# EAGLE board arduino-breakout (EAGLE 5.00)
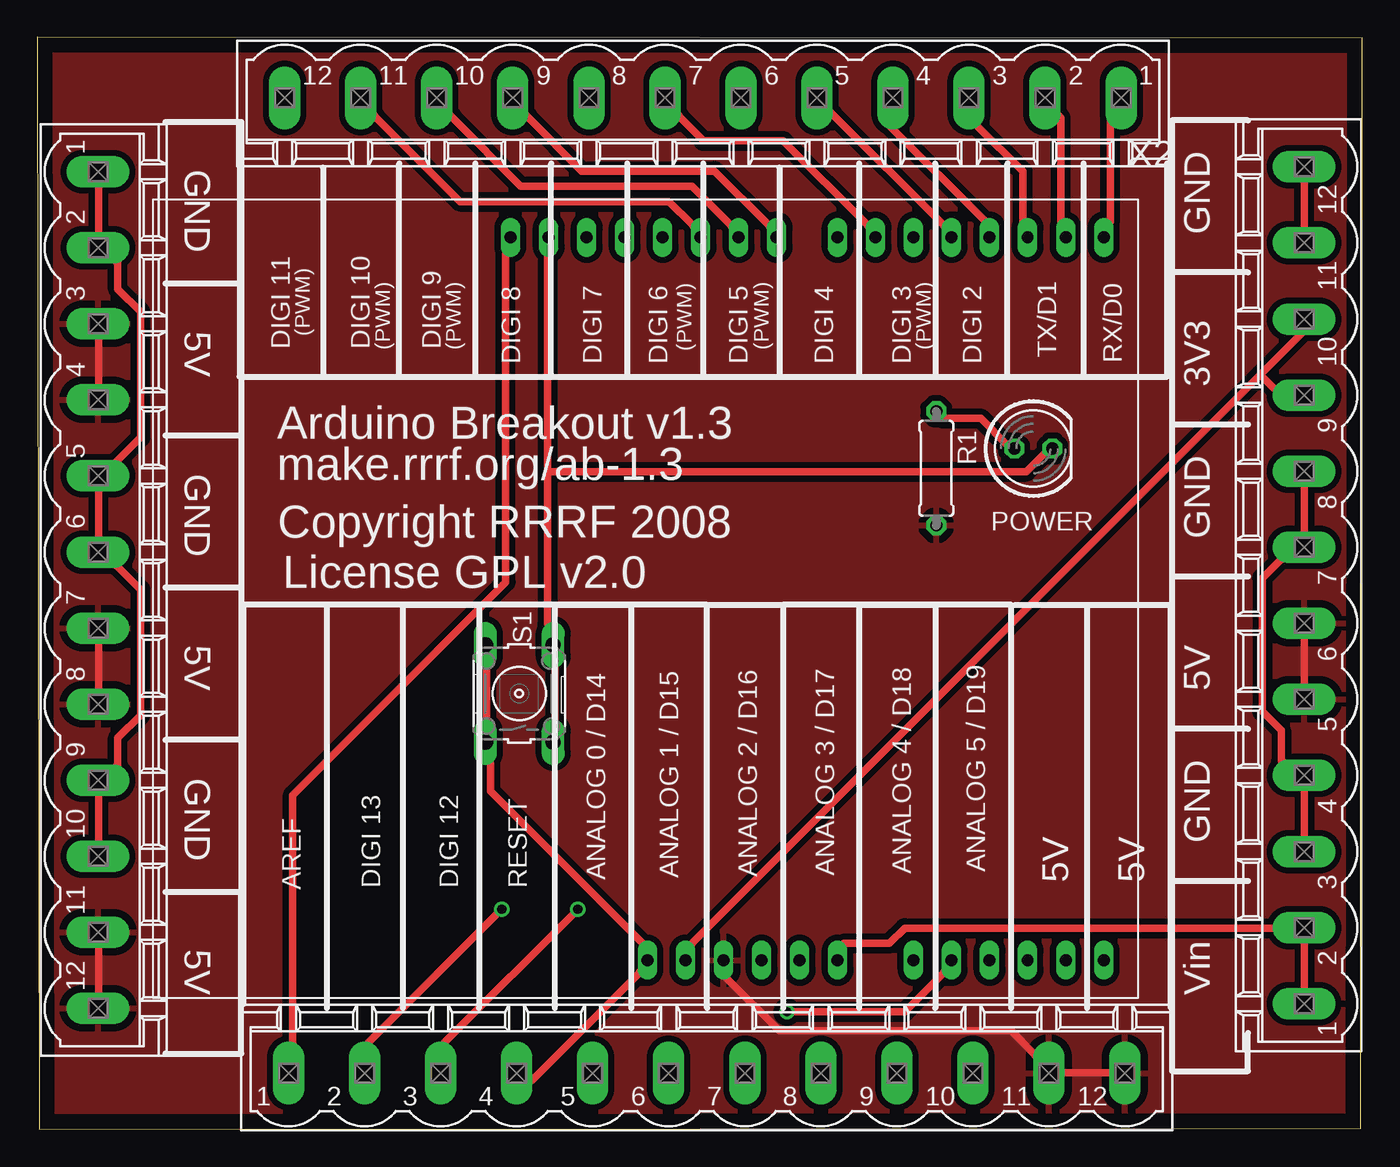
[diagram p0: board, top side]
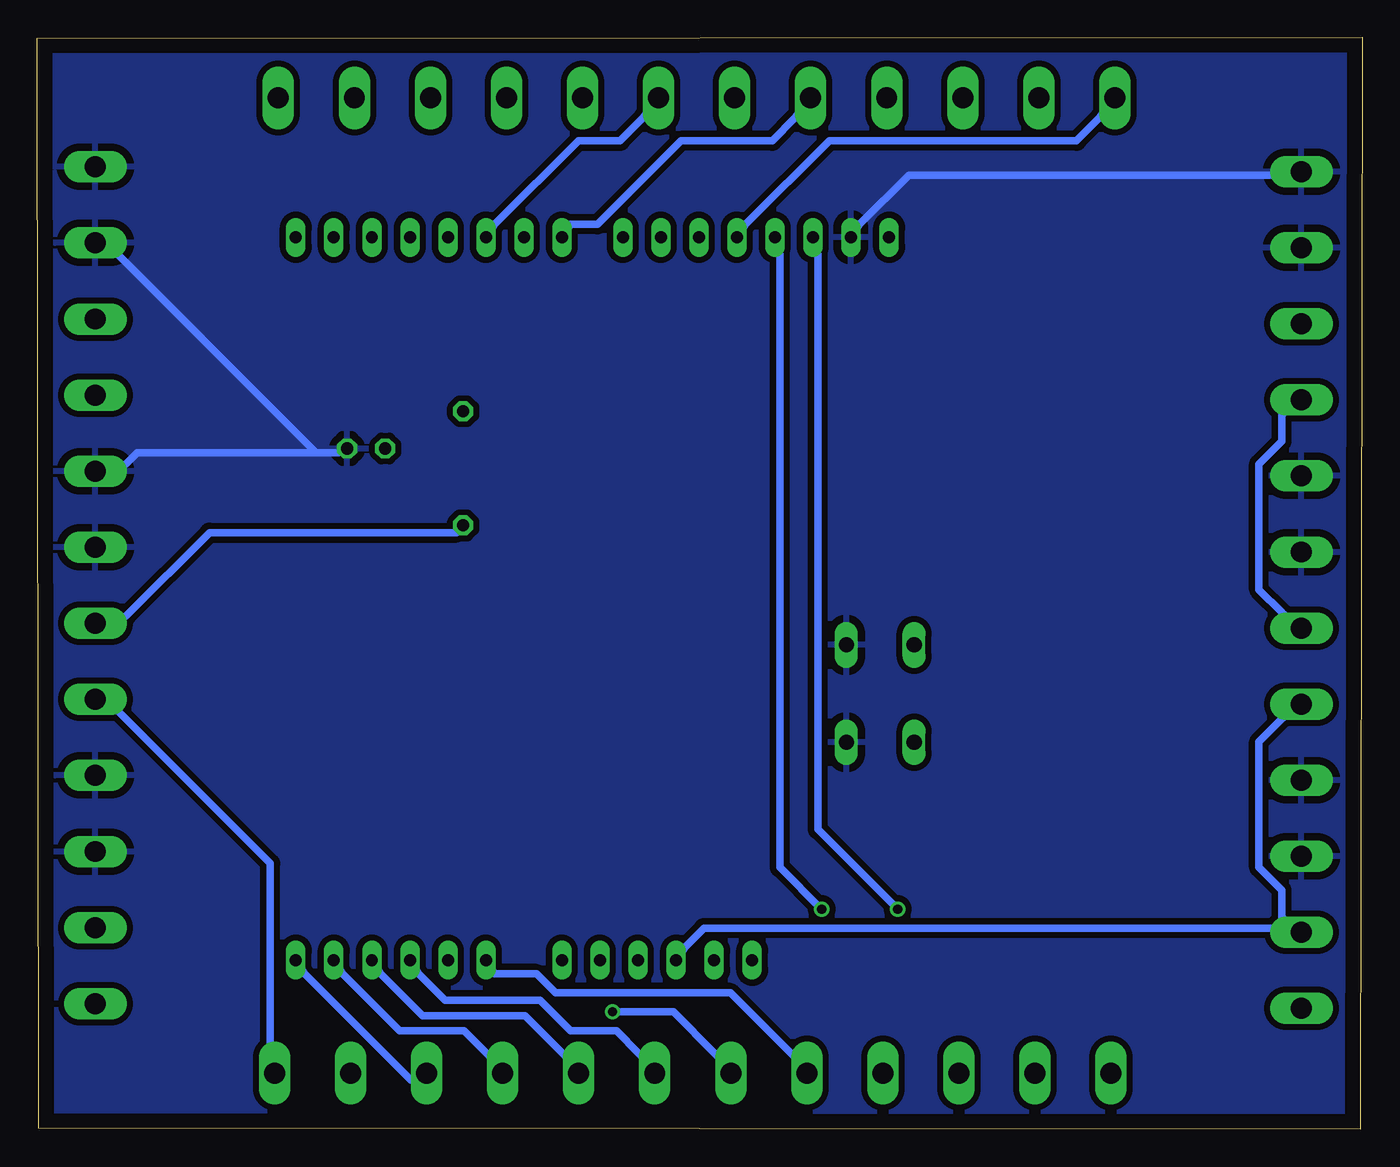
[diagram p1: board, bottom side, seen from below]

Size 88.49 x 72.91 mm. Coordinates in mm from the lower left corner, seen from the top.
Outline: 0.13,0 88.39,0.07 88.49,72.86 0,72.91 0.13,0
Copper layers (1*16): Top 0.035mm / dielectric 1.5mm / Bottom 0.035mm
Design rules "default": minimum track width 10mil, minimum drill 24mil, track to track 8mil, track to pad 8mil, pad to pad 8mil, via to via 8mil, smd to smd 8mil, copper to edge 40mil, drill to drill 8mil, minimum pad ring 10mil, minimum via ring 8mil, stop-mask expansion 4mil, vias tented up to drill 0mil, thermal gap 20mil
Net classes: 0 default: width 0.508 mm, clearance 0.406 mm

## Footprints (pad centres in the part's own frame; a part is rotated, then mirrored left to right if it is on the bottom)
LED5MM = drill 0.813 octagon: A -1.27,0; K 1.27,0
0207/7 = drill 0.813 octagon: 1 -3.81,0; 2 3.81,0
B3F-10XX = drill 1.016 long: 1 -3.251,2.261; 2 3.251,2.261; 3 -3.251,-2.261; 4 3.251,-2.261
ARDUINO = drill 0.8 long: 3V3 6.604,-45.72; 5V 9.144,-45.72; ANALOG0 21.844,-45.72; ANALOG1 24.384,-45.72; ANALOG2 26.924,-45.72; ANALOG3 29.464,-45.72; ANALOG4 32.004,-45.72; ANALOG5 34.544,-45.72; AREF -5.08,2.54; DIGITAL2 29.464,2.54; DIGITAL3 26.924,2.54; DIGITAL4 24.384,2.54; DIGITAL5 21.844,2.54; DIGITAL6 19.304,2.54; DIGITAL7 16.764,2.54; DIGITAL8 12.7,2.54; DIGITAL9 10.16,2.54; DIGITAL10 7.62,2.54; DIGITAL11 5.08,2.54; DIGITAL12 2.54,2.54; DIGITAL13 0,2.54; GND -2.54,2.54; GND1 14.224,-45.72; GND2 11.684,-45.72; RESET 4.064,-45.72; RX 34.544,2.54; TX 32.004,2.54; VIN 16.764,-45.72
MSTBV12 = drill 1.397 long: 1 -27.94,0; 2 -22.86,0; 3 -17.78,0; 4 -12.7,0; 5 -7.62,0; 6 -2.54,0; 7 2.54,0; 8 7.62,0; 9 12.7,0; 10 17.78,0; 11 22.86,0; 12 27.94,0

## Placement (x,y rotation side)
POWER  [LED5MM]  66.53,45.46 0 top
R1  560  [0207/7]  60.05,44.14 270 top
S1  [B3F-10XX]  32.19,29.1 90 top
U$1  ARDUINODIECIMILIA  [ARDUINO]  36.69,57.02 0 top
X1  MSTBV12  [MSTBV12]  84.62,36.33 90 top
X2  MSTBV12  [MSTBV12]  44.46,68.88 180 top
X3  MSTBV12  [MSTBV12]  4.05,36.01 270 top
X5  MSTBV12  [MSTBV12]  44.71,3.75 0 top

## Library data of the parts
POWER = led
R1 = rcl
S1 = switch-omron
U$1 = reprap
X1-X3 X5 = con-phoenix-508

## Nets
GND: POWER.K S1.3 S1.4 U$1.GND X1.3 X1.4 X1.7 X1.8 X1.11 X1.12 X3.1 X3.2 X3.5 X3.6 X3.9 X3.10
N$1: U$1.RX X2.1
N$2: U$1.TX X2.2
N$3: U$1.DIGITAL2 X2.3
N$4: U$1.DIGITAL3 X2.4
N$5: U$1.DIGITAL4 X2.5
N$6: U$1.DIGITAL5 X2.6
N$7: U$1.DIGITAL6 X2.7
N$8: U$1.DIGITAL7 X2.8
N$9: U$1.DIGITAL8 X2.9
N$10: U$1.DIGITAL9 X2.10
N$11: U$1.DIGITAL10 X2.11
N$12: U$1.DIGITAL11 X2.12
N$13: U$1.DIGITAL12 X5.3
N$14: U$1.DIGITAL13 X5.2
N$15: S1.1 S1.2 U$1.RESET X5.4
N$16: POWER.A R1.1
N$17: U$1.ANALOG5 X5.10
N$18: U$1.ANALOG4 X5.9
N$19: U$1.ANALOG3 X5.8
N$20: U$1.ANALOG2 X5.7
N$21: U$1.ANALOG1 X5.6
N$22: U$1.ANALOG0 X5.5
N$23: U$1.AREF X5.1
N$26: U$1.3V3 X1.9 X1.10
N$28: U$1.VIN X1.1 X1.2
VCC: R1.2 U$1.5V X1.5 X1.6 X3.3 X3.4 X3.7 X3.8 X3.11 X3.12 X5.11 X5.12

## Tracks (layer width: path | path; a pad name or v marks a point on that pad's centre or on a via)
GND
  Top 0.508: X1.11 84.62,60.17 84.62,63.47 X1.12 | X1.3 84.62,19.53 84.62,22.83 X1.4 83.09,24.61 83.09,26.64 81.82,27.91 81.82,36.8 83.09,38.07 X1.7 84.62,39.85 84.62,43.15 X1.8 | 34.07,43.91 34.07,33.75 S1.4 34.58,30.96 34.58,27.15 S1.3 | 34.07,43.91 34.07,58.39 U$1.GND | X3.1 4.1,62.96 4.1,59.91 X3.2 5.37,57.88 5.37,56.1 6.89,54.58 6.89,46.2 5.37,44.67 X3.5 4.1,42.64 4.1,39.59 X3.6 5.37,37.56 6.89,36.04 6.89,27.66 5.37,26.13 5.37,24.35 X3.9 4.1,22.32 4.1,19.27 X3.10 | 34.07,43.91 66.07,43.91 67.34,45.18 POWER.K
  Bottom 0.508: 69.88,45.18 81.82,45.18 82.58,44.42 X1.8 | 69.88,45.18 68.36,45.18 POWER.K | 69.88,45.18 83.09,58.39 X1.11 | U$1.GND 33.56,60.42 30.26,63.72 6.13,63.72 X3.1
  pour Bottom: -0.35,73.63 89.19,73.63 89.19,-0.67 -0.35,-0.67
N$1
  Top 0.508: U$1.RX 71.66,60.68 71.66,67.28 X2.1
N$2
  Top 0.508: U$1.TX 68.36,60.68 68.36,67.53 X2.2
N$3
  Top 0.508: U$1.DIGITAL2 65.82,60.68 65.82,63.98 62.77,67.03 X2.3
N$4
  Top 0.508: U$1.DIGITAL3 63.28,60.68 56.93,67.03 X2.4
N$5
  Top 0.508: U$1.DIGITAL4 60.49,60.42 53.12,67.79 X2.5
N$6
  Bottom 0.508: U$1.DIGITAL5 57.95,60.42 52.36,66.01 49.56,66.01 48.04,67.53 X2.6
N$7
  Top 0.508: U$1.DIGITAL6 55.41,60.42 49.82,66.01 44.48,66.01 42.96,67.53 X2.7
N$8
  Bottom 0.508: U$1.DIGITAL7 52.87,60.42 51.09,60.42 45.5,66.01 39.4,66.01 37.88,67.53 X2.8
N$9
  Top 0.508: U$1.DIGITAL8 48.8,60.42 45.25,63.98 36.36,63.98 32.8,67.53 X2.9
N$10
  Top 0.508: U$1.DIGITAL9 46.26,60.42 43.72,62.96 32.29,62.96 27.72,67.53 X2.10
N$11
  Top 0.508: U$1.DIGITAL10 43.72,60.42 42.2,61.95 28.23,61.95 22.64,67.53 X2.11
N$12
  Bottom 0.508: U$1.DIGITAL11 41.18,60.42 35.59,66.01 19.08,66.01 17.56,67.53 X2.12
N$13  (via drill 0.61)
  Top 0.508: v36.1,14.7 27.21,5.81 X5.3
  Bottom 0.508: v36.1,14.7 38.9,17.5 38.9,58.39 U$1.DIGITAL12
N$14  (via drill 0.61)
  Top 0.508: v31.02,14.7 22.13,5.81 X5.2
  Bottom 0.508: v31.02,14.7 36.36,20.04 36.36,58.39 U$1.DIGITAL13
N$15
  Top 0.508: S1.2 30.01,30.96 30.01,27.15 S1.1 30.26,24.35 30.26,22.58 40.42,12.42 U$1.RESET 40.17,10.38 33.05,3.27 X5.4
N$16
  Top 0.508: R1.1 60.49,47.47 63.03,47.47 64.8,45.69 POWER.A
N$17
  Bottom 0.508: U$1.ANALOG5 70.65,10.38 63.53,3.27 X5.10
N$18
  Bottom 0.508: U$1.ANALOG4 68.11,10.38 64.3,6.57 59.98,6.57 58.45,5.05 X5.9
N$19
  Bottom 0.508: U$1.ANALOG3 65.57,10.38 62.77,7.59 55.91,7.59 53.37,5.05 X5.8
N$20
  Bottom 0.508: U$1.ANALOG2 63.03,10.38 61.25,8.61 54.9,8.61 52.87,6.57 49.82,6.57 48.29,5.05 X5.7
N$21  (via drill 0.61)
  Top 0.508: v50.07,7.84 57.95,7.84 60.49,10.38 U$1.ANALOG1
  Bottom 0.508: v50.07,7.84 46.01,7.84 43.21,5.05 X5.6
N$22
  Bottom 0.508: U$1.ANALOG0 57.95,10.38 55.15,10.38 53.88,9.11 42.2,9.11 38.13,5.05 X5.5
N$23
  Top 0.508: U$1.AREF 31.28,58.39 31.28,36.55 17.05,22.32 17.05,5.81 X5.1
N$26
  Top 0.508: 81.69,50.39 84.62,53.31 X1.10 | 81.69,50.39 43.72,12.42 U$1.3V3 | X1.9 82.58,49.5 81.69,50.39
N$28
  Top 0.508: U$1.VIN 53.88,12.42 56.93,12.42 57.95,13.43 82.58,13.43 X1.2 84.62,12.67 84.62,9.37 X1.1
VCC
  Top 0.508: X3.4 4.1,49.75 4.1,52.8 X3.3 | X3.12 4.1,9.11 4.1,12.16 X3.11 | X3.8 4.1,29.43 4.1,32.48 X3.7 | U$1.5V 46.01,10.13 49.56,6.57 65.06,6.57 66.58,5.05 X5.11 68.61,3.78 71.66,3.78 X5.12 | X1.5 84.62,29.69 84.62,32.99 X1.6
  Bottom 0.508: X3.8 5.37,27.4 6.89,25.88 6.89,17.5 5.37,15.97 5.37,14.19 X3.11 6.13,13.43 43.98,13.43 45.25,12.16 U$1.5V | X3.4 5.37,47.72 5.37,45.94 6.89,44.42 6.89,36.04 5.37,34.51 X3.7 | R1.2 60.49,39.85 77,39.85 82.58,34.26 X1.6 | X5.12 72.93,5.81 72.93,17.75 83.09,27.91 X1.5
  pour Top: -0.35,73.63 89.19,73.63 89.19,-0.67 -0.35,-0.67

## Text on the board
tPlace: GND | GND | TX/D1 | RX/D0 | 5V | DIGI 11 | (PWM) | DIGI 10 | DIGI 9 | (PWM) | (PWM) | DIGI 8 | DIGI 7 | DIGI 6 | (PWM) | DIGI 5 | (PWM) | DIGI 4 | DIGI 3 | (PWM) | DIGI 2 | 3V3 | Arduino Breakout v1.3 | GND | make.rrrf.org/ab-1.3 | Copyright RRRF 2008 | GND | License GPL v2.0 | 5V | 5V | GND | GND | ANALOG 5 / D19 | DIGI 13 | DIGI 12 | RESET | ANALOG 0 / D14 | ANALOG 1 / D15 | ANALOG 2 / D16 | ANALOG 3 / D17 | ANALOG 4 / D18 | 5V | 5V | AREF | 5V | Vin